# Altium PCB PCB1.PcbDoc (part 2 of 2)
Units mm, origin at the board's own origin, x right, y up, seen from the top; angles counter-clockwise.
Board outline 100 x 91 mm, 2 copper layers (Top Layer, Bottom Layer); 156 components, 114 nets, 531 pads, 381 vias.
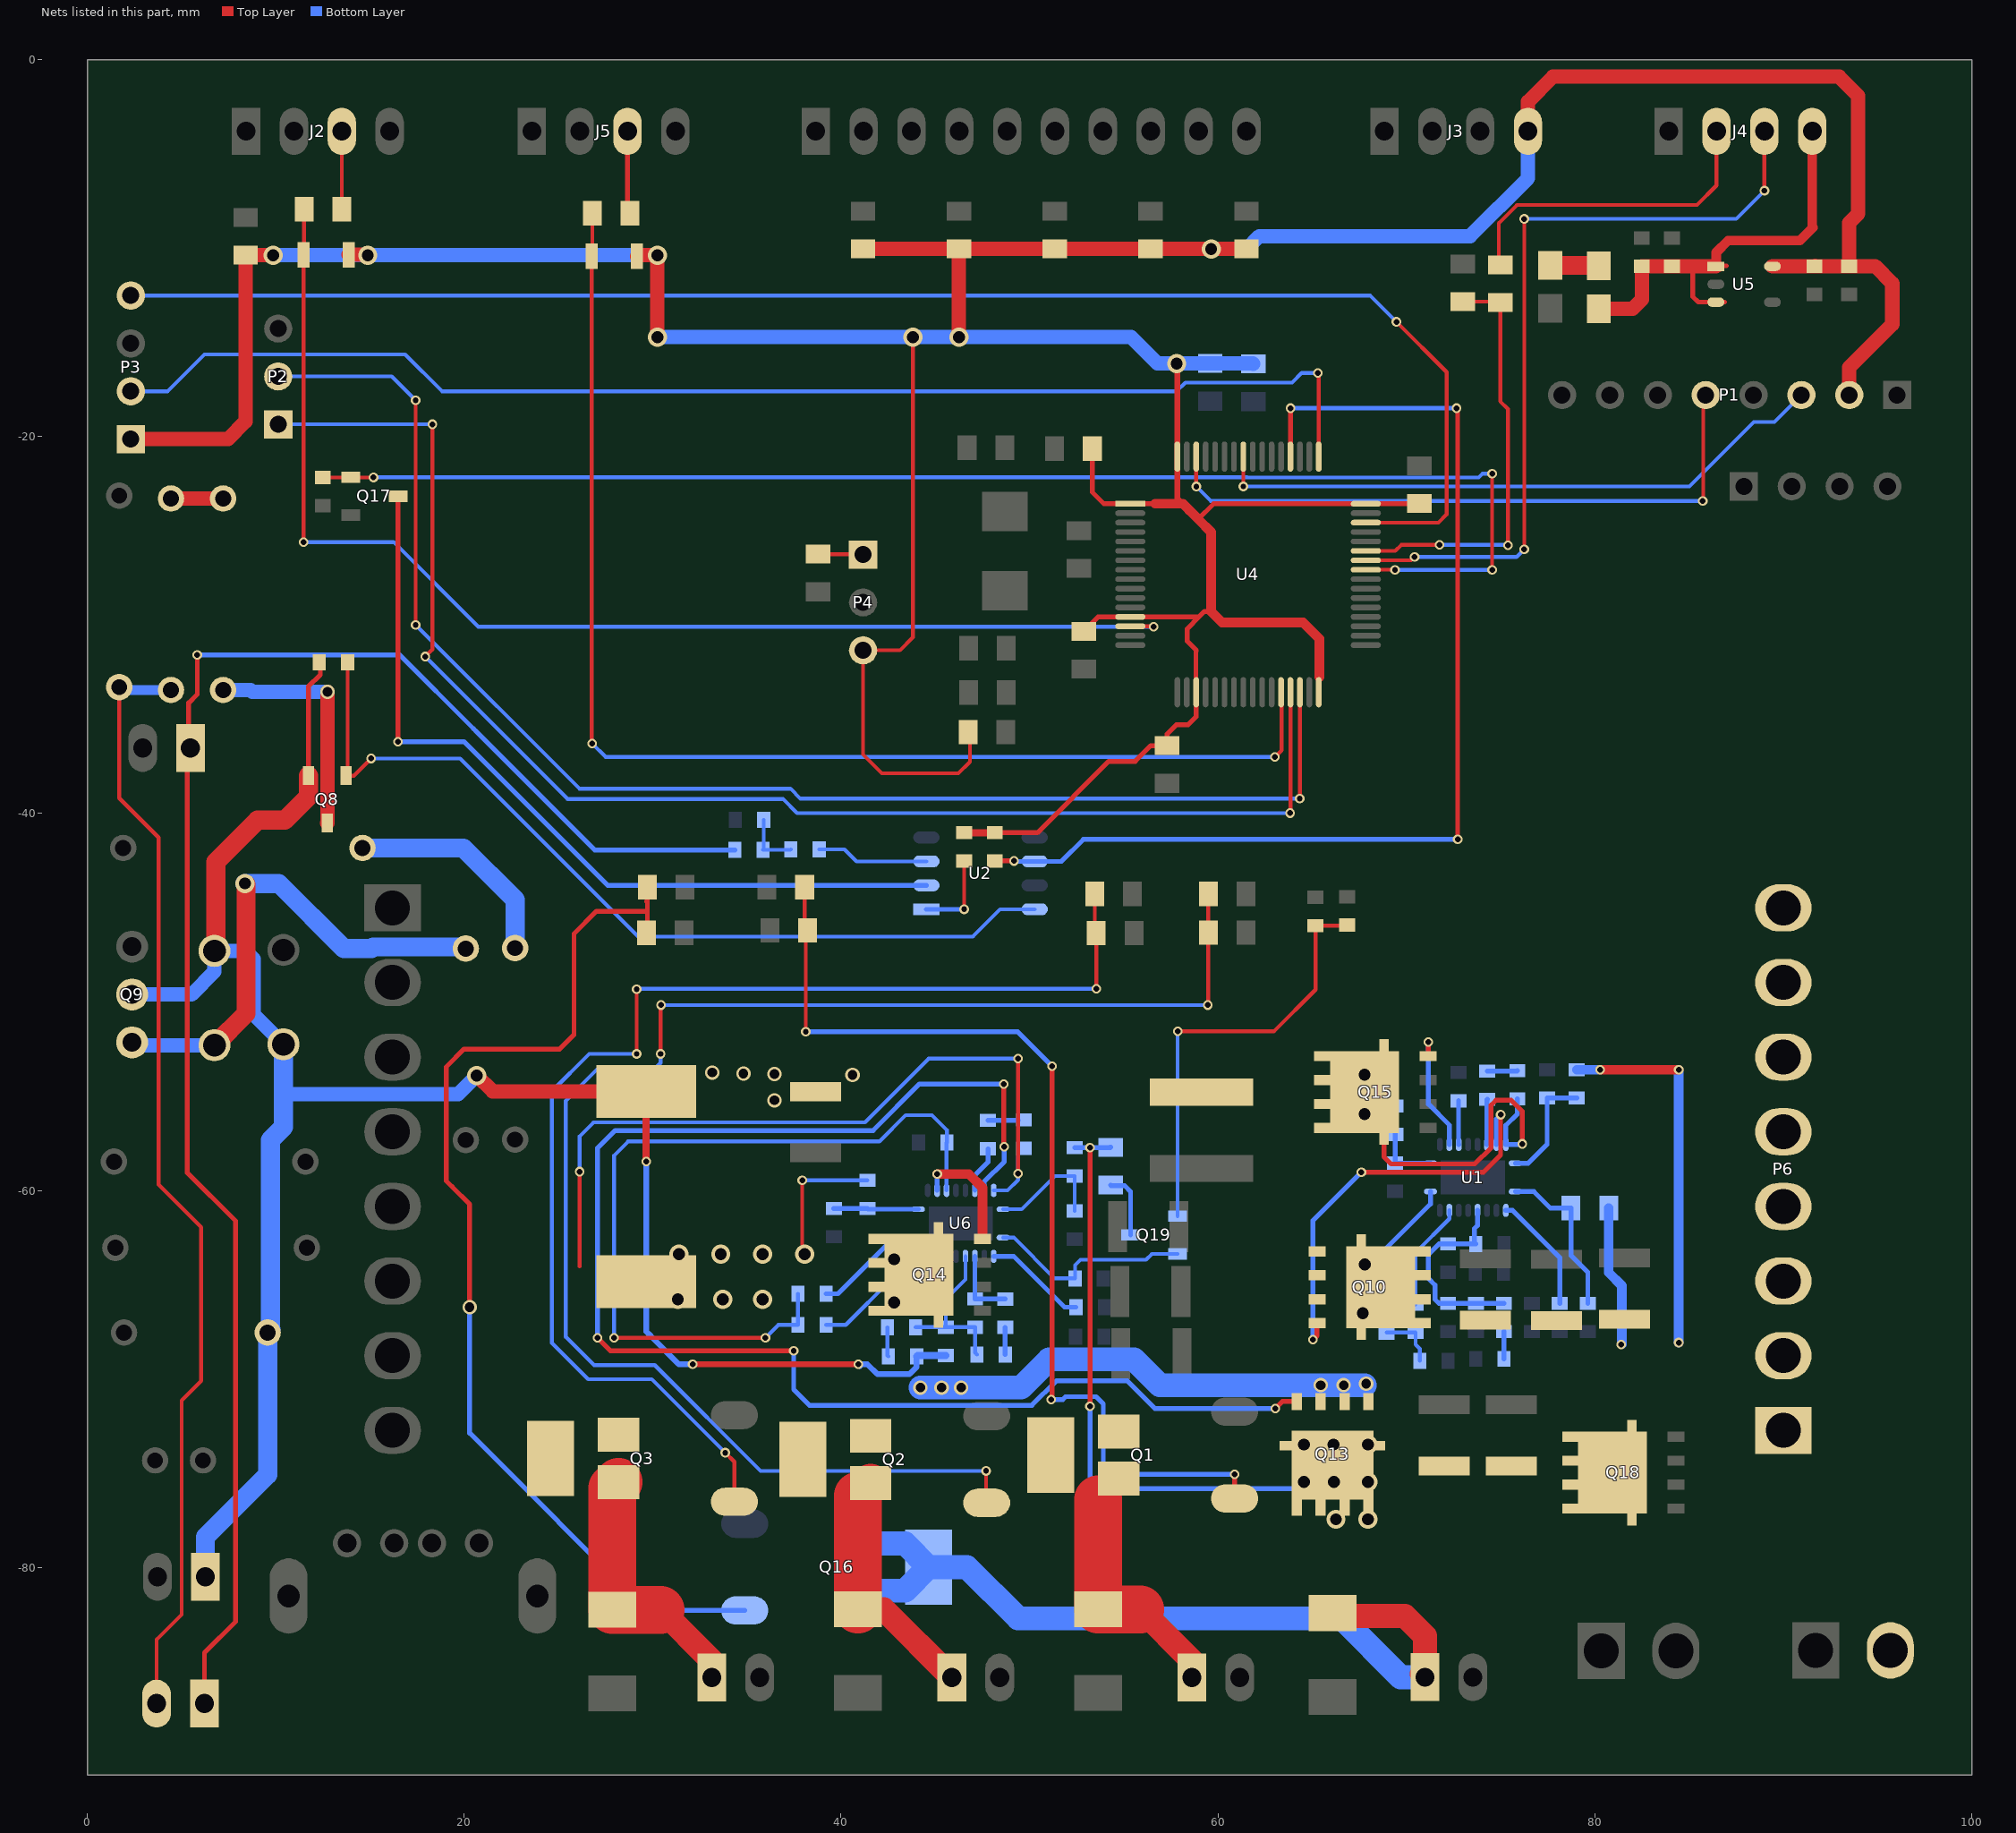
[diagram p2: the nets of this part, all layers, seen from the top]

## Via types
v1: diameter 0.762, hole 0.508, Top Layer to Bottom Layer, tented both sides, 182 vias
v2: diameter 0.508, hole 0.305, Top Layer to Bottom Layer, tented both sides, 142 vias
v3: diameter 1.016, hole 0.635, Top Layer to Bottom Layer, tented both sides, 57 vias

## Nets (pads, with @x,y where several pads share a name; then routed paths per layer and width w, separated by ;. In a path a pad name is that pad's centre, name@x,y a point inside that pad or via, vN(x,y) a via of type N, cw(c..) or ccw(c..) an arc to the next point about the centre after c; other vN are vias at no path point) (continued)
NetC24_2: C24.2 Q9.1 R61.2 | length 26.9
  Top Layer w1.016: C24.2@6.751,-52.295 8.427,-50.618 v3@8.427,-43.764
  Bottom Layer w0.762: Q9.1@2.382,-52.146 2.53,-52.295 C24.2@6.751,-52.295
  Bottom Layer w1.016: v3(8.376,-43.713) 8.966,-43.713 9.621,-43.713 10.16,-43.713 13.614,-47.168 15.085,-47.168 15.169,-47.083 20.001,-47.083 R61.2@20.086,-47.168
NetC32_2: C32.2 C54.1 R29.1 R45.1 R65.2 U1.5 | length 10.9
  Bottom Layer w0.254: U1.5@73.777,-61.059 73.777,-61.853 73.603,-62.027 73.603,-62.765 C32.2@73.678,-62.84 R29.1@72.206,-62.84 71.724,-62.84 71.165,-63.398 71.165,-64.668 71.521,-65.024 71.521,-65.786 71.724,-65.989 72.208,-65.989 R45.1@72.21,-65.988 R65.2@73.692,-65.988 C54.1@75.175,-65.988
NetC38_1: C38.1 R35.1 | length 1.6
  Bottom Layer w0.254: R35.1@47.797,-56.286 C38.1@49.397,-56.286
NetC38_2: C38.2 L5.1 Q13.1 Q13.2 Q13.3 Q14.5 Q14.6 Q14.7 Q14.8 R38.1 U6.19 | length 72.8
  Top Layer w0.203: 26.131,-64.033 v2(26.131,-59.004) ; 37.942,-62.865 v2(37.942,-59.461) ; v2(49.397,-59.106) v2(49.397,-53.01)
  Bottom Layer w0.203: v2(26.131,-59.004) 26.131,-57.125 26.867,-56.388 41.269,-56.388 44.647,-53.01 v2(49.397,-53.01) ; v2(37.942,-59.461) R38.1@41.396,-59.461 ; U6.19@48.099,-59.997 48.836,-59.997 49.397,-59.436 v2(49.397,-59.106) C38.2@49.397,-57.786
  Bottom Layer w1.27: v1(44.216,-70.46) v1(45.333,-70.46) v1(46.375,-70.46) 49.55,-70.46 51.048,-68.961 55.544,-68.961 56.916,-70.333 v1(65.45,-70.333) v1(66.669,-70.333) v1@67.787,-70.333
  other v1: 67.863,-70.256
  other v3: 42.819,-65.938 31.338,-65.786 33.725,-65.786 35.834,-65.786 42.819,-63.652 31.389,-63.373 33.615,-63.373 35.842,-63.373 38.069,-63.373
NetC39_2: C39.2 R37.2 U6.20 | length 6.4
  Bottom Layer w0.203: U6.20@48.599,-60.997 49.588,-60.997 51.352,-59.234 R37.2@52.394,-59.234 C39.2@52.394,-61.086
NetC40_2: C40.2 R38.2 U6.11 | length 4.5
  Bottom Layer w0.254: C40.2@39.618,-60.959 39.621,-60.961 R38.2@41.396,-60.961 41.432,-60.997 U6.11@44.099,-60.997
NetC43_1: C43.1 R31.1 | length 1.6
  Bottom Layer w0.254: R31.1@74.289,-53.67 75.864,-53.67 C43.1@75.889,-53.645
NetC43_2: C43.2 L1.1 Q10.1 Q10.2 Q10.3 Q15.5 Q15.6 Q15.7 Q15.8 R27.1 U1.19 | length 19
  Top Layer w0.254: Q15.8@68.805,-56.778 68.805,-58.219 69.184,-58.598 73.629,-58.598 74.492,-57.734 74.492,-55.474 74.746,-55.22 75.559,-55.22 76.143,-55.804 v2(76.143,-57.531)
  Bottom Layer w0.254: v3(67.78,-55.952) 68.207,-55.524 R27.1@69.412,-55.524 ; C43.2@75.889,-55.145 75.889,-55.931 75.277,-56.543 U1.19@75.277,-57.559 76.115,-57.559 v2(76.143,-57.531)
  other v3: 67.78,-53.858
NetC47_2: C47.2 R33.2 U1.20 | length 6.1
  Bottom Layer w0.254: U1.20@75.777,-58.559 76.462,-58.559 77.464,-57.556 C47.2@77.464,-55.094 R33.2@79.039,-55.094
NetC49_2: C49.2 R27.2 U1.11 | length 3.4
  Bottom Layer w0.254: R27.2@69.412,-57.024 69.412,-58.52 C49.2@69.387,-58.546 69.4,-58.559 U1.11@71.277,-58.559
NetC51_1: C51.1 C52.1 U6.4 | length 3.9
  Bottom Layer w0.254: U6.4@47.099,-63.497 47.099,-65.747 C52.1@47.111,-65.759 48.71,-65.759 C51.1@48.711,-65.761
NetC51_2: C51.2 R41.2 | length 1.4
  Bottom Layer w0.254: C51.2@48.711,-67.261 48.711,-68.704 R41.2@48.713,-68.706
NetC52_2: C52.2 C53.1 R41.1 R43.1 R44.2 U6.5 | length 8.8
  Bottom Layer w0.203: C53.1@43.962,-67.258 43.963,-67.256 R44.2@45.562,-67.256 ; U6.5@46.599,-63.497 46.599,-64.722 R43.1@45.562,-65.759 R44.2@45.562,-67.256 ; R41.1@47.213,-68.706 47.111,-68.604 C52.2@47.111,-67.259 47.108,-67.256 R44.2@45.562,-67.256
NetC53_2: C53.2 R46.2 | length 1.6
  Bottom Layer w0.203: C53.2@42.462,-67.258 42.462,-68.756 R46.2@42.512,-68.807
NetC54_2: C54.2 R66.2 | length 1.4
  Bottom Layer w0.254: C54.2@75.175,-67.488 75.18,-67.492 R66.2@75.18,-68.936
NetC55_1: C55.1 R64.2 R73.2 | length 3.1
  Bottom Layer w0.203: R64.2@68.955,-67.54 R73.2@70.485,-67.54 70.485,-68.174 70.714,-68.402 C55.1@70.714,-69.037
NetFB1_2: FB1.2 FU2.1 | length 2.6
  Top Layer w1.016: FB1.2@77.638,-10.922 80.178,-10.922 FU2.1@80.203,-10.947
NetHUMID1_1: HUMID1.1 HUMID3.1 R57.2 | length 90.5
  Top Layer w0.254: v2(5.836,-31.598) 5.836,-33.68 5.379,-34.138 5.379,-36.424 HUMID3.1@5.481,-36.525 5.303,-36.703 5.303,-59.055 7.868,-61.62 7.868,-82.88 6.217,-84.531 HUMID1.1@6.217,-87.224
  Bottom Layer w0.254: v2(5.836,-31.598) 15.189,-31.598 16.586,-31.598 20.498,-35.509 20.625,-35.636 26.924,-41.935 R57.2@34.365,-41.935
NetHUMID1_2: HUMID1.2 R25.2 R26.2 | length 59.5
  Top Layer w0.203: R26.2@1.696,-33.299 1.696,-39.186 3.785,-41.275 3.785,-59.69 6.045,-61.951 6.045,-70.104 5.004,-71.145 5.004,-82.499 3.677,-83.826 HUMID1.2@3.677,-87.224
  Bottom Layer w0.203: R26.2@1.696,-33.299 R26.2@1.848,-33.452
  Bottom Layer w0.508: R26.2@1.848,-33.452 R25.2@4.439,-33.452
NetJ2_3: J2.3 R2.1 | length 4.1
  Top Layer w0.203: R2.1@13.507,-7.95 J2.3@13.507,-3.81
NetJ5_3: J5.3 R4.1 | length 4.4
  Top Layer w0.254: J5.3@28.671,-3.81 28.671,-8.021 R4.1@28.804,-8.153
NetL2_1: L2.1 R60.2 | length 11.8
  Bottom Layer w1.016: L2.1@14.605,-41.834 19.959,-41.834 22.702,-44.577 R60.2@22.702,-47.142
NetP4_1: P4.1 R17.2 | length 2.4
  Top Layer w0.203: R17.2@38.78,-26.245 41.149,-26.245 P4.1@41.168,-26.264
NetQ1_1: Q1.1 R1.2 R3.2 | length 54.9
  Top Layer w0.203: v2@38.037,-51.499 v2(38.125,-51.587) 38.125,-49.911 ; R3.2@38.068,-46.602 R3.2@38.075,-46.609 ; R1.2@38.068,-43.917 38.068,-46.101 38.125,-46.158 38.125,-49.911 ; 38.125,-48.92 38.125,-49.911
  Top Layer w0.254: v2@51.201,-71.044 v2(51.201,-53.416) ; Q1.1@60.88,-76.341 v2@60.88,-75.059
  Bottom Layer w0.254: v2(38.125,-51.587) 49.372,-51.587 v2(51.201,-53.416) ; v2(51.15,-71.095) 51.759,-71.095 51.912,-70.942 53.537,-70.942 53.918,-71.323 53.918,-74.473 54.503,-75.057 v2(60.878,-75.057)
NetQ2_1: Q2.1 R5.2 R6.2 | length 83.4
  Top Layer w0.203: v2(30.423,-52.756) 30.423,-50.19 v2(30.449,-50.165) ; v2(47.695,-74.879) 47.695,-76.543 Q2.1@47.722,-76.57 ; v2@59.488,-50.139 R6.2@59.488,-46.323 ; R6.2@59.488,-46.304 R6.2@59.488,-46.323 ; R5.2@59.488,-44.272 59.488,-46.285 59.469,-46.304 R6.2@59.488,-46.323
  Bottom Layer w0.203: v2(30.423,-52.756) 30.423,-53.238 30.068,-53.594 27.045,-53.594 25.394,-55.245 25.394,-67.767 26.893,-69.266 30.119,-69.266 35.732,-74.879 v2(47.695,-74.879) ; v2(30.449,-50.165) v2(59.461,-50.165) v2@59.487,-50.14
NetQ3_1: Q3.1 R10.2 R11.2 | length 66
  Top Layer w0.203: v2(29.153,-52.756) v2(29.153,-49.327) ; v2(33.852,-73.914) 34.337,-74.398 Q3.1@34.337,-76.519 ; R10.2@53.468,-44.272 53.468,-46.272 R11.2@53.544,-46.348 v2(53.544,-49.301)
  Bottom Layer w0.203: v2(29.153,-52.756) 26.639,-52.756 24.658,-54.737 24.658,-68.097 26.575,-70.015 29.953,-70.015 v2(33.852,-73.914) ; v2(29.153,-49.327) 29.179,-49.301 v2@53.543,-49.301
NetQ8_1: Q8.1 R63.1 U2.8 | length 47.6
  Top Layer w0.203: 13.812,-32.969 13.812,-33.096 ; R63.1@13.812,-31.979 13.812,-33.096 ; v2(15.062,-37.084) 14.148,-37.998 Q8.1@13.736,-37.998 13.812,-37.922 13.812,-33.096
  Bottom Layer w0.203: v2(15.062,-37.084) 19.787,-37.084 29.235,-46.533 34.544,-46.533 46.99,-46.533 48.438,-45.085 U2.8@50.276,-45.085
NetQ8_3: Q8.3 R24.2 | length 12.7
  Top Layer w0.762: Q8.3@12.736,-40.498 12.752,-40.482 12.752,-37.141 v1(12.752,-33.554)
  Bottom Layer w0.762: R24.2@7.309,-33.553 R24.2@7.208,-33.452 8.661,-33.452 8.764,-33.554 v1(12.752,-33.554)
NetQ10_4: Q10.4 U1.18 | length 22.2
  Top Layer w0.254: v2(65.044,-67.92) 65.257,-67.706 Q10.4@65.257,-67.04 ; v2(67.609,-59.03) 74.086,-59.03 75,-58.115 v2(75,-55.982)
  Bottom Layer w0.254: v2(65.044,-67.92) 65.044,-61.595 v2(67.609,-59.03) ; U1.18@74.777,-57.559 74.777,-56.205
NetQ13_4: Q13.4 U6.18 | length 80.2
  Top Layer w0.254: v2(27.071,-67.818) 27.756,-68.504 v2(37.485,-68.504) ; v2@48.635,-57.683 v2(48.635,-54.356) ; v2(63.037,-71.577) 63.415,-71.199 Q13.4@64.175,-71.199
  Bottom Layer w0.254: v2(27.071,-67.818) 27.071,-57.76 28.01,-56.82 41.701,-56.82 44.165,-54.356 v2(48.635,-54.356) ; v2(37.485,-68.504) 37.485,-70.561 38.323,-71.399 50.127,-71.399 51.422,-70.104 55.188,-70.104 56.662,-71.577 v2(63.037,-71.577) ; U6.18@47.599,-59.997 47.599,-59.532 48.661,-58.471 v2(48.661,-57.683)
NetQ14_4: Q14.4 U6.13 | length 6.3
  Top Layer w0.508: v2(45.105,-59.131) 46.781,-59.131 47.507,-59.858 Q14.4@47.507,-62.576
  Bottom Layer w0.254: U6.13@45.099,-59.997 45.099,-59.137 v2(45.105,-59.131)
NetQ15_4: Q15.4 U1.13 | length 6.7
  Top Layer w0.254: Q15.4@71.155,-52.873 71.165,-52.863 v2(71.165,-52.121)
  Bottom Layer w0.254: v2(71.165,-52.121) 71.165,-55.423 72.277,-56.535 U1.13@72.277,-57.559
NetQ16_1: Q16.1 R52.2 R53.2 | length 58.9
  Top Layer w0.254: v1(20.289,-66.192) 20.289,-60.731 19.352,-59.794 19.05,-59.493 19.05,-53.442 19.99,-52.502 25.07,-52.502 25.832,-51.74 25.832,-46.38 27.026,-45.187 29.693,-45.187 ; R53.2@29.674,-46.33 29.725,-46.279 R52.2@29.725,-43.917 29.719,-43.917 29.719,-44.653 29.693,-44.679
  Bottom Layer w0.254: v1(20.289,-66.192) 20.289,-72.873 29.701,-82.285 Q16.1@34.892,-82.285
NetQ17_3: Q17.3 U2.2 | length 44.2
  Top Layer w0.254: Q17.3@16.479,-23.163 Q17.3@16.49,-23.174 v2(16.49,-36.19) v2@16.485,-36.195
  Bottom Layer w0.254: v2(16.49,-36.19) 19.985,-36.19 27.61,-43.815 U2.2@44.526,-43.815
NetQ19_1: Q19.1 R71.2 R72.1 | length 23.1
  Top Layer w0.203: v2(57.861,-51.562) 62.967,-51.562 65.176,-49.352 R71.2@65.176,-45.95 65.202,-45.95 66.826,-45.95 R72.1@66.853,-45.923
  Bottom Layer w0.203: Q19.1@57.861,-61.366 v2(57.861,-51.562)
NetQ19_2: Q19.2 R34.2 U6.1 | length 11.1
  Bottom Layer w0.203: U6.1@48.599,-62.497 49.162,-62.497 51.333,-64.668 R34.2@52.418,-64.668 52.418,-63.964 52.705,-63.678 56.185,-63.678 56.496,-63.366 Q19.2@57.861,-63.366
NetQ19_3: Q19.3 R36.1 | length 3.5
  Bottom Layer w0.254: R36.1@54.299,-59.715 54.325,-59.741 55.042,-59.741 55.361,-60.06 Q19.3@55.361,-62.366
NetR23_1: R23.1 U2.1 | length 4.6
  Top Layer w0.203: v2(46.533,-45.085) R23.1@46.533,-42.519
  Bottom Layer w0.203: v2@46.507,-45.059 v2(46.533,-45.085)
  Bottom Layer w0.254: U2.1@44.526,-45.085 v2(46.533,-45.085)
NetR24_1: R24.1 R25.1 | length 2.8
  Top Layer w0.762: R25.1@4.439,-23.292 R24.1@7.208,-23.292
NetR31_2: R31.2 U1.17 | length 2.4
  Bottom Layer w0.254: U1.17@74.277,-57.559 74.277,-55.182 R31.2@74.289,-55.17
NetR32_1: R32.1 R68.2 U1.1 | length 8.7
  Bottom Layer w0.254: U1.1@75.777,-60.059 76.766,-60.059 77.642,-60.935 R32.1@78.734,-60.935 78.734,-63.449 79.623,-64.338 R68.2@79.623,-65.988
NetR35_2: R35.2 U6.17 | length 2.5
  Bottom Layer w0.254: U6.17@47.099,-59.997 47.099,-59.194 47.797,-58.496 R35.2@47.797,-57.786
NetR39_1: R39.1 U6.10 | length 6.1
  Bottom Layer w0.254: R39.1@39.237,-65.481 R39.1@39.212,-65.481 39.835,-65.481 42.819,-62.497 U6.10@44.099,-62.497
NetR40_1: R40.1 U6.8 | length 7.7
  Bottom Layer w0.203: R40.1@39.212,-67.132 40.253,-67.132 42.692,-64.694 44.495,-64.694 45.099,-64.09 U6.8@45.099,-63.497
NetR47_2: R47.2 U6.2 | length 5.5
  Bottom Layer w0.254: U6.2@48.099,-63.497 49.166,-63.497 51.861,-66.192 R47.2@52.469,-66.192
NetR55_2: R55.2 R56.2 U4.43 | length 22.8
  Top Layer w0.203: U4.43@67.847,-26.071 69.407,-26.071 69.723,-25.756 v2(71.755,-25.756) v2@71.78,-25.781 ; R55.2@73,-12.846 74.93,-12.846 R56.2@74.981,-12.897 74.981,-18.136 75.387,-18.542 v2(75.387,-25.781)
  Bottom Layer w0.203: v2(71.755,-25.756) 75.362,-25.756 v2(75.387,-25.781)
NetR57_1: R57.1 R62.2 R69.2 | length 3.1
  Bottom Layer w0.203: R62.2@35.892,-40.335 35.892,-41.909 R57.1@35.865,-41.935 37.311,-41.935 R69.2@37.337,-41.91
NetR64_1: R64.1 U1.10 | length 6.9
  Bottom Layer w0.254: R64.1@68.955,-66.04 68.955,-63.043 71.277,-60.721 U1.10@71.277,-60.059
NetR67_2: R67.2 U1.2 | length 6.3
  Bottom Layer w0.254: U1.2@75.277,-61.059 75.633,-61.059 78.14,-63.567 R67.2@78.14,-65.988
NetR69_1: R69.1 U2.3 | length 6
  Bottom Layer w0.203: R69.1@38.837,-41.91 40.183,-41.91 40.818,-42.545 U2.3@44.526,-42.545
NetR73_1: R73.1 U1.8 | length 5.7
  Bottom Layer w0.203: R73.1@70.485,-66.04 70.485,-63.297 72.277,-61.505 U1.8@72.277,-61.059
OUT1: D1.A J1.1 Q1.2 | length 12.8
  Top Layer w1.27: 55.877,-82.22 58.617,-84.961 J1.1@58.617,-85.839
  Top Layer w2.54: 53.638,-76.382 D1.A@53.638,-82.22 55.877,-82.22
OUT2: D4.A J6.1 Q2.2 | length 13.5
  Top Layer w1.27: D4.A@40.901,-82.22 42.26,-82.22 J6.1@45.879,-85.839
  Top Layer w2.032: Q2.2@40.901,-76.191 Q2.2@41.572,-75.52
  Top Layer w2.54: D4.A@40.901,-82.22 Q2.2@40.901,-76.191
OUT3: D5.A J7.1 Q3.2 | length 14.2
  Top Layer w1.27: 30.426,-82.245 33.141,-84.961 J7.1@33.141,-85.839
  Top Layer w2.54: Q3.2@28.187,-75.469 27.858,-75.797 D5.A@27.858,-82.245 30.426,-82.245
OUT4: D6.A J9.1 Q16.2 | length 45
  Top Layer w1.27: D6.A@66.085,-82.423 66.237,-82.575 69.92,-82.575 70.987,-83.642 J9.1@70.987,-85.827 J9.1@70.809,-85.649
  Bottom Layer w1.27: Q16.2@41.042,-81.235 43.392,-81.235 Q16.2@44.642,-79.985 ; Q16.2@41.042,-78.735 43.392,-78.735 Q16.2@44.642,-79.985 ; J9.1@71.063,-85.75 J9.1@70.987,-85.827 69.692,-85.827 66.568,-82.702 49.397,-82.702 46.679,-79.985 Q16.2@44.642,-79.985
PWM: Q17.1 R54.2 U4.41 | length 74
  Top Layer w0.203: R54.2@12.497,-22.173 13.988,-22.173 Q17.1@13.99,-22.174 v2(15.189,-22.174) ; U4.41@67.847,-27.071 69.388,-27.071 v2(69.393,-27.076) ; v2(74.549,-27.076) v2(74.549,-21.971)
  Bottom Layer w0.203: v2(15.189,-22.174) 15.195,-22.168 61.547,-22.168 61.553,-22.174 73.838,-22.174 74.041,-21.971 v2(74.549,-21.971) ; v2(69.393,-27.076) v2(74.549,-27.076)
RES: P1.5 U4.62 | length 34.7
  Top Layer w0.203: U4.62@58.847,-21.071 58.847,-22.651 v2(58.852,-22.656) ; v2@85.75,-23.419 85.75,-21.565 ; 85.75,-21.361 85.75,-21.565 ; P1.5@85.877,-17.805 85.75,-17.932 85.75,-21.565
  Bottom Layer w0.203: v2(58.852,-22.656) 59.614,-23.419 83.058,-23.419 v2(85.725,-23.419) v2@85.75,-23.419
RX: J4.2 R56.1 | length 17.5
  Top Layer w0.203: R56.1@74.981,-10.897 74.905,-10.82 74.905,-8.687 75.87,-7.722 85.42,-7.722 86.456,-6.686 J4.2@86.456,-3.81
RX3: P2.2 U4.30 | length 76.1
  Top Layer w0.203: v2(17.424,-29.997) v2(17.424,-18.085) ; v2(64.338,-39.218) 64.347,-39.209 U4.30@64.347,-33.571
  Bottom Layer w0.203: P2.2@10.135,-16.815 16.154,-16.815 v2(17.424,-18.085) ; v2(17.424,-29.997) 26.111,-38.684 37.313,-38.684 37.846,-39.218 v2(64.338,-39.218)
SCK: P1.3 U4.57 | length 33.2
  Top Layer w0.203: v2@61.341,-22.656 v2(61.347,-22.651) U4.57@61.347,-21.071
  Bottom Layer w0.203: v2(61.347,-22.651) 85.02,-22.651 88.439,-19.232 89.531,-19.232 P1.3@90.957,-17.805
SW1: D2.A R2.2 U4.14 | length 65.9
  Top Layer w0.203: v2(11.481,-25.603) 11.475,-25.597 D2.A@11.475,-10.363 11.507,-10.331 R2.2@11.507,-7.95 ; U4.14@55.347,-30.071 56.563,-30.071 v2(56.591,-30.099)
  Bottom Layer w0.203: v2(11.481,-25.603) 13.31,-25.603 16.256,-25.603 20.752,-30.099 v2(56.591,-30.099)
SW2: D3.A R4.2 U4.28 | length 69
  Top Layer w0.203: v2@26.772,-36.271 D3.A@26.772,-10.439 ; 26.772,-11.176 D3.A@26.772,-10.439 ; R4.2@26.804,-8.153 26.804,-10.407 D3.A@26.772,-10.439 ; v2(63.017,-37.008) 63.373,-36.652 63.373,-33.598 U4.28@63.347,-33.571
  Bottom Layer w0.203: v2(26.797,-36.297) 27.508,-37.008 v2(63.017,-37.008)
SWCLK: P3.2 U4.49 | length 69.5
  Top Layer w0.203: v2(65.303,-16.637) 65.347,-16.68 U4.49@65.347,-21.071
  Bottom Layer w0.203: P3.2@2.311,-17.602 4.267,-17.602 6.223,-15.646 13.386,-15.646 16.866,-15.646 18.821,-17.602 18.847,-17.602 57.81,-17.602 58.268,-17.145 63.932,-17.145 64.44,-16.637 v2(65.303,-16.637)
SWD: P3.4 U4.46 | length 83.5
  Top Layer w0.203: U4.46@67.847,-24.571 71.695,-24.571 72.136,-24.13 72.136,-16.586 v2(69.469,-13.919)
  Bottom Layer w0.203: P3.4@2.311,-12.522 68.072,-12.522 v2(69.469,-13.919)
TX: J4.3 U4.42 | length 42.7
  Top Layer w0.203: U4.42@67.847,-26.571 70.254,-26.571 v2(70.434,-26.391) ; v2(76.251,-25.984) v2(76.251,-8.458) ; J4.3@88.996,-3.81 88.996,-6.954 v2(89.002,-6.96)
  Bottom Layer w0.203: v2(70.434,-26.391) 73.508,-26.391 75.844,-26.391 v2(76.251,-25.984) ; v2(76.251,-8.458) 87.503,-8.458 v2(89.002,-6.96)
TX3: P2.1 U4.29 | length 76.4
  Top Layer w0.203: v2(17.937,-31.678) 18.313,-31.301 v2(18.313,-19.355) ; U4.29@63.847,-33.571 63.856,-33.58 v2@63.856,-39.954
  Bottom Layer w0.203: P2.1@10.135,-19.355 v2(18.313,-19.355) ; v2(17.937,-31.678) 25.489,-39.23 36.919,-39.23 37.668,-39.98 v2(63.83,-39.98) v2@63.856,-39.954
VCC: C27.2 C28.1 FU2.2 J4.4 U5.1 U5.3 | length 23.4
  Top Layer w0.254: 85.268,-10.974 85.192,-11.05 85.192,-12.573 85.491,-12.873 U5.3@86.42,-12.873 86.878,-12.873 ; U5.1@86.736,-10.947 86.979,-10.947
  Top Layer w0.508: U5.1@86.42,-10.973 86.436,-10.957 86.436,-10.236 87.071,-9.601 90.881,-9.601 91.567,-8.915 91.536,-8.884 J4.4@91.536,-3.81
  Top Layer w0.762: FU2.2@80.203,-13.233 81.991,-13.233 82.489,-12.735 C28.1@82.489,-10.973 82.491,-10.974 C27.2@84.089,-10.974 85.268,-10.974 86.419,-10.974 U5.1@86.42,-10.973
VCC_3.3V: C4.2 C5.2 C6.2 C7.2 C26.2 C56.1 D2.K D3.K J3.4 P1.2 P3.1 P4.3 R7.2 R8.2 R9.2 R12.1 R13.1 R15.1 R22.2 R23.2 R58.2 R59.1 R70.2 U4.1 U4.13 U4.19 U4.32 U4.48 U4.64 U5.5 | length 267.4
  Top Layer w0.203: v3(43.815,-14.732) 43.815,-30.658 43.129,-31.344 P4.3@41.168,-31.344 41.168,-36.875 42.164,-37.871 46.228,-37.871 46.838,-37.262 46.838,-35.789 R15.1@46.736,-35.687
  Top Layer w0.254: R23.2@46.433,-40.919 R23.2@46.533,-41.019 ; R70.2@48.158,-41.019 50.421,-41.019 54.204,-37.236 55.608,-37.236 56.439,-36.405 C6.2@57.302,-36.405 57.302,-35.789 57.791,-35.3 58.408,-35.3 58.847,-34.861 U4.19@58.847,-33.571 ; C4.2@52.883,-30.334 53.646,-29.571 U4.13@55.347,-29.571 ; C5.2@53.333,-20.65 53.333,-22.955 53.95,-23.571 U4.1@55.347,-23.571 56.667,-23.571 ; U4.13@55.355,-29.563 U4.13@55.347,-29.571 ; U4.19@58.839,-33.563 U4.19@58.847,-33.571 ; 58.966,-24.397 58.953,-24.384 59.766,-23.571 U4.48@67.847,-23.571 70.682,-23.571 C7.2@70.688,-23.565 ; 59.639,-29.286 59.284,-29.286 58.999,-29.571 ; U4.13@55.347,-29.571 58.999,-29.571 ; U4.19@58.847,-33.571 58.826,-33.551 58.826,-31.392 58.847,-31.372 58.847,-31.338 58.369,-30.861 58.369,-30.201 58.999,-29.571
  Top Layer w0.305: v3@57.861,-16.129 57.847,-16.144 U4.64@57.847,-21.071 57.847,-23.277 58.141,-23.571
  Top Layer w0.381: R23.2@46.533,-41.019 R70.2@48.158,-41.019
  Top Layer w0.508: 56.667,-23.571 58.141,-23.571 58.636,-24.066 ; 58.453,-23.883 58.636,-24.066 ; 58.953,-24.384 58.636,-24.066 ; 58.966,-24.397 59.639,-25.07 59.639,-29.286 60.223,-29.87 64.516,-29.87 65.378,-30.732 65.378,-32.766
  Top Layer w0.762: P3.1@2.311,-20.142 7.468,-20.142 8.402,-19.208 R22.2@8.402,-10.382 9.849,-10.382 v3(9.855,-10.389) ; D2.K@13.875,-10.363 14.707,-10.363 v3@14.732,-10.389 ; D3.K@29.172,-10.439 29.222,-10.389 v3(30.251,-10.389) v3(30.251,-14.732) ; R9.2@41.168,-10.052 R8.2@46.254,-10.052 ; v3(46.254,-14.731) R8.2@46.254,-10.052 ; R58.2@61.513,-10.052 R59.1@56.427,-10.052 R7.2@51.34,-10.052 R8.2@46.254,-10.052 ; J3.4@76.448,-3.81 76.448,-2.241 77.775,-0.914 92.96,-0.914 93.976,-1.93 93.976,-8.183 93.497,-8.661 93.497,-10.961 C56.1@93.487,-10.971 ; U5.5@89.42,-10.973 91.651,-10.973 C26.2@91.678,-10.946 ; C26.2@91.653,-10.971 C56.1@93.487,-10.971 ; P1.2@93.497,-17.805 93.497,-16.332 95.783,-14.046 95.783,-11.886 94.869,-10.971 C56.1@93.487,-10.971
  Bottom Layer w0.305: P4.3@41.041,-31.217 P4.3@41.168,-31.344
  Bottom Layer w0.762: v3(9.855,-10.389) v3(14.884,-10.389) v3(30.251,-10.389) ; v3(30.251,-14.732) 55.397,-14.732 56.794,-16.129 v3(57.81,-16.129) R13.1@59.588,-16.129 61.849,-16.129 R12.1@61.874,-16.154 ; v3(59.639,-10.052) 61.513,-10.052 62.192,-9.373 73.381,-9.373 76.448,-6.305 J3.4@76.448,-3.81
VCC_12_24: J12.2 P6.5 P6.6 P6.7 P6.8
VCC_24V: C16.2 C17.2 C24.1 C41.1 HUMID2.1 L5.2 Q8.2 Q9.2 R44.1 R46.1 R63.2 | length 113.4
  Top Layer w0.254: Q8.2@11.736,-37.998 11.736,-33.273 12.37,-32.639 12.37,-32.037 R63.2@12.312,-31.979
  Top Layer w0.305: v2(32.125,-69.215) v2(40.914,-69.215)
  Top Layer w0.381: v2(29.661,-58.471) L5.2@29.661,-54.746
  Top Layer w0.762: v3(20.67,-53.907) 21.51,-54.746 L5.2@29.661,-54.746
  Top Layer w1.016: C24.1@6.751,-47.295 6.827,-47.219 6.827,-44.094 ; 6.827,-43.434 6.827,-44.094 ; Q8.2@11.736,-37.998 11.736,-39.1 10.475,-40.361 9.037,-40.361 6.827,-42.57 6.827,-44.094
  Bottom Layer w0.305: v2(29.661,-58.471) 29.661,-67.488 29.839,-67.666 29.992,-67.818 31.389,-69.215 v2(32.125,-69.215) ; v2@41.015,-69.317 v2(40.914,-69.215) 41.396,-69.215 41.93,-69.748 43.631,-69.748 44.012,-69.367 R46.1@44.012,-68.807
  Bottom Layer w0.381: R46.1@44.012,-68.807 44.063,-68.756 R44.1@45.562,-68.756
  Bottom Layer w0.762: Q9.2@2.382,-49.606 5.531,-49.606 6.751,-48.387 C24.1@6.751,-47.295 ; C24.1@6.598,-47.447 C24.1@6.751,-47.295 ; 10.408,-54.585 10.713,-54.889 19.687,-54.889 v3(20.67,-53.907) ; C16.2@10.408,-52.244 8.833,-50.669 8.833,-47.727 8.402,-47.295 C24.1@6.751,-47.295
  Bottom Layer w1.016: HUMID2.1@6.268,-80.493 6.268,-78.384 9.57,-75.082 C17.2@9.57,-67.539 C17.2@9.722,-67.386 ; C17.2@9.748,-67.361 C17.2@9.722,-67.386 ; C16.2@10.408,-52.244 10.408,-54.585 10.408,-56.642 9.722,-57.328 C17.2@9.722,-67.386
  other v1: 36.469,-55.22 40.609,-53.873 36.469,-53.823 34.818,-53.796 33.167,-53.746
VCC_L: C50.1 R39.2 R40.2 U6.14 | length 43.4
  Top Layer w0.203: v2(27.96,-67.818) v2(35.986,-67.818)
  Bottom Layer w0.203: v2(27.96,-67.818) 27.96,-58.141 28.696,-57.404 42.031,-57.404 43.428,-56.007 44.825,-56.007 45.613,-56.794 C50.1@45.613,-57.455 ; v2(35.986,-67.818) 36.672,-67.132 R40.2@37.712,-67.132 R39.2@37.712,-65.481 ; 45.581,-58.362 45.599,-58.344 ; U6.14@45.599,-59.997 45.599,-58.344 ; C50.1@45.599,-57.468 45.599,-58.344
VCC_L2: C13.1 U1.14 | length 2.3
  Bottom Layer w0.254: C13.1@72.765,-55.245 72.765,-57.547 U1.14@72.777,-57.559
VIN: C9.1 C10.1 C19.1 C20.1 C42.1 P6.1 P6.2 P6.3 P6.4 Q10.5 Q10.6 Q10.7 Q10.8 Q13.5 Q13.6 Q13.7 Q13.8 Q18.5 Q18.6 Q18.7 Q18.8 R32.2 R33.1 R36.2 R37.1 | length 58.6
  Top Layer w0.254: v2(53.207,-71.45) v2(53.207,-57.734)
  Top Layer w0.508: v2(80.284,-53.594) v2(84.449,-53.594)
  Bottom Layer w0.254: R37.1@52.394,-57.734 v2(53.207,-57.734) 54.281,-57.734 R36.2@54.299,-57.715 ; v2(53.207,-71.45) 53.207,-75.267 53.766,-75.826 64.198,-75.826 v3(64.561,-75.463) ; R36.2@54.281,-57.709 R36.2@54.299,-57.709
  Bottom Layer w0.508: R33.1@79.039,-53.594 v2(80.284,-53.594) ; R32.2@80.734,-60.935 80.734,-64.357 81.427,-65.049 v2@81.427,-68.148 ; v2(84.449,-68.072) v2(84.449,-53.594)
  other v2: 81.401,-68.174
  other v3: 66.263,-77.445 67.965,-77.445 66.161,-75.463 67.965,-75.463 64.561,-73.482 66.123,-73.482 67.965,-73.482 67.685,-66.523 67.787,-63.932
WATER_ADC: R70.1 U2.6 U4.52 | length 59.3
  Top Layer w0.254: R70.1@48.158,-42.519 v2(49.179,-42.519) ; U4.52@63.847,-21.071 v2(63.847,-18.5) ; v2(72.66,-18.5) 72.72,-18.56 v2(72.72,-41.377)
  Bottom Layer w0.254: v2(49.179,-42.519) 49.205,-42.545 U2.6@50.276,-42.545 51.689,-42.545 52.857,-41.377 v2(72.72,-41.377) ; v2(63.847,-18.5) v2(72.66,-18.5)
pads on no net: J5.1 U1.7 U4.10 U4.11 U4.25 U4.37 U4.38 U4.39 U4.40 U4.44 U4.45 U4.50 U4.51 U4.54 U6.7 USB1.2 USB1.3 USB1.6

## Polygon pours and split planes (outlines as drawn)
GND on Top Layer "Top Layer-No Net" (solid, remove dead copper, pour order 1001): -5.781,12.597 99.782,12.597 100.645,13.461 102.22,11.886 102.22,-89.993 101.89,-89.993 98.385,-93.498 97.673,-92.787 -4.028,-92.787 -4.028,-85.497 -7.178,-82.348 -3.165,-78.335 -3.165,13.639
+5V on Top Layer "Top Layer-No Net" (solid, remove dead copper, pour order 1000): 16.41,-42.872 27.581,-42.872 28.214,-42.872 28.541,-43.02 29.21,-43.321 29.21,-47.804 29.21,-50.216 28.395,-50.583 27.93,-50.793 22.112,-50.793 18.795,-50.793 18.446,-50.95 18.33,-51.003 18.33,-51.894 18.33,-77.457 18.737,-77.641 19.668,-77.641 20.25,-77.641 20.482,-77.745 20.89,-77.929 20.89,-78.584 20.89,-80.682 20.017,-81.075 19.901,-81.128 16.991,-81.128 15.188,-81.128 14.082,-80.629 9.195,-78.427 9.195,-43.872 9.195,-43.819 10.358,-43.295 11.296,-42.872 16.41,-42.872
GND on Bottom Layer "Top Layer-No Net" (solid, remove dead copper, pour order 1002): -5.369,9.649 100.193,9.649 101.057,10.513 102.631,8.938 102.631,-92.942 102.301,-92.942 98.796,-96.447 98.085,-95.736 -3.617,-95.736 -3.617,-88.446 -6.766,-85.296 -2.753,-81.283 -2.753,10.69

## Keep-outs
Keep-Out Layer:
  the board outline again, w0.254

## Other copper
Top Layer:
  rectangle net GND: 79.344,-88.113 81.198,-80.518
  rectangle net GND: 77.363,-84.963 82.163,-83.642
  rectangle net GND: 91.485,-87.097 92.501,-82.372
  rectangle net GND: 89.758,-85.09 92.349,-83.845
  rectangle net GND: 83.264,-73.406 86.405,-72.067
  rectangle net GND: 72.773,-64.694 84.017,-62.027
  rectangle net GND: 70.759,-57.785 72.638,-53.899
  rectangle net GND: 69.946,-72.814 77.152,-70.917
  rectangle net GND: 74.429,-72.282 77.152,-70.053
  rectangle net GND: 53.817,-71.468 56.001,-60.503
  rectangle net GND: 53.817,-61.468 55.442,-59.207
  rectangle net GND: 46.484,-67.158 49.245,-63.617
  rectangle net GND: 59.913,-74.435 62.598,-72.06
  rectangle net VCC_12_24: 93.415,-90.602 99.588,-50.825
  rectangle net VCC_12_24: 86.786,-58.318 99.537,-42.52
  rectangle net OUT2: 36.596,-76.403 42.717,-71.984
  rectangle net OUT3: 23.159,-76.224 29.668,-71.882
  rectangle net OUT1: 49.905,-76.251 55.9,-71.831
  pour cut-out: 11.932,-42.824 11.932,-50.597 9.062,-50.597 9.062,-42.824
  pour cut-out: 12.872,-61.396 13.177,-61.7 13.177,-63.783 12.593,-64.367 10.637,-64.367 10.307,-64.037 10.307,-61.396
  pour cut-out: 8.712,-66.319 10.439,-66.319 10.77,-66.65 10.77,-68.224 10.312,-68.682 8.712,-68.682 8.458,-68.428 8.458,-66.497 8.534,-66.497
  pour cut-out: 10.719,-57.252 12.446,-57.252 12.776,-57.582 12.776,-59.157 12.319,-59.614 10.719,-59.614 10.465,-59.36 10.465,-57.429 10.541,-57.429
  pour cut-out: 11.932,-50.597 11.932,-52.984 11.348,-53.569 9.062,-53.569 9.062,-50.597
  region net VCC_24V: 40.99,-53.289 41.168,-53.467 41.168,-55.118 40.558,-55.728 35.63,-55.728 34.868,-56.49 26.893,-56.49 26.486,-56.083 26.486,-53.492 26.69,-53.289
  region net NetC38_2: 64.917,-71.73 68.32,-71.73 68.447,-71.603 68.447,-69.901 68.371,-69.825 64.917,-69.825
  region net +12V: 61.919,-57.709 62.3,-58.09 62.3,-70.079 62.072,-70.307 58.541,-70.307 58.541,-78.486 63.85,-83.795 63.85,-85.903 63.316,-86.436 60.446,-86.436 59.989,-85.979 59.989,-82.906 56.611,-79.527 56.611,-60.122 55.925,-60.122 55.722,-59.919 55.722,-57.836 55.849,-57.709
  region net NetC43_2: 66.009,-66.294 66.237,-66.065 66.237,-58.217 66.542,-57.912 69.692,-57.912 69.971,-57.633 69.971,-51.867 69.641,-51.537 64.663,-51.537 63.926,-52.273 56.077,-52.273 55.595,-52.756 55.595,-55.448 55.95,-55.804 62.783,-55.804 62.783,-66.167 62.91,-66.294
  region net VIN: 82.773,-78.232 82.773,-71.882 83.001,-71.653 87.065,-71.653 87.243,-71.831 87.243,-74.701 87.548,-74.905 92.12,-74.905 92.12,-58.903 86.049,-58.903 85.643,-59.309 85.643,-64.694 85.16,-65.176 72.511,-65.176 72.283,-64.948 72.283,-62.357 71.851,-61.925 66.999,-61.925 66.72,-62.205 66.72,-68.301 67.66,-69.24 77.439,-69.24 77.439,-73.177 69.844,-73.177 68.93,-72.263 63.342,-72.263 62.885,-72.72 62.885,-78.232
  region net +48V: 88.429,-88.062 88.437,-83.922 88.437,-75.87 86.684,-75.87 86.684,-73.762 83.205,-73.762 83.205,-81.89 82.544,-82.55 82.544,-88.062
  region net NetC38_2: 45.994,-62.281 45.994,-67.462 46.883,-68.351 46.883,-71.069 43.479,-71.069 43.479,-67.412 43.073,-67.005 23.362,-67.005 22.651,-66.294 22.651,-62.281
Bottom Layer:
  rectangle net GND: 79.649,-87.681 80.969,-81.28
  rectangle net GND: 77.591,-84.963 82.163,-83.337
  rectangle net GND: 91.358,-87.579 92.374,-81.991
  rectangle net GND: 89.758,-85.014 92.069,-83.845
  rectangle net VIN: 87.573,-74.549 92.247,-59.131
  rectangle net VCC_12_24: 93.39,-90.602 99.638,-57.277
  rectangle net VCC_12_24: 86.938,-58.318 99.664,-42.545
  pour cut-out: 12.598,-61.824 10.871,-61.824 10.541,-62.154 10.541,-63.729 10.998,-64.186 12.598,-64.186 12.852,-63.932 12.852,-62.001 12.776,-62.001
  pour cut-out: -0.102,-34.849 4.115,-34.849 4.115,-41.326 4.623,-41.834 10.897,-41.834 13.166,-44.103 13.166,-73.981 8.458,-78.689 8.458,-90.881 8.331,-91.008 8.179,-90.856 -0.432,-90.856 -0.432,-35.179
  pour cut-out: 11.627,-50.597 11.932,-50.902 11.932,-52.984 11.348,-53.569 9.392,-53.569 9.062,-53.238 9.062,-50.597
  region net +48V: 88.429,-88.062 88.437,-83.922 88.437,-75.87 86.684,-75.87 86.684,-75.844 83.205,-75.844 83.205,-81.89 82.544,-82.55 82.544,-88.062

## Silkscreen, mask and mechanical layers (free items; w line width, h text height)
Top Overlay:
  lines w0.127: 13.05,-42.872 13.05,-75.181 13.076,-75.207 ; 93.099,-42.85 93.15,-42.901
  text "串口" at 86.202,3.2 h1.27
  text "目标温度、环境温度、压缩机排气温度、目标送风温度、水温度" at 35.935,2.261 h1.27
  text "iic湿度" at 70.936,2.083 h1.27
  text "湿度" at 9.951,1.803 h1.27
  text "-  SW2" at 26.01,-1.676 h1.27
  text "5V" at 30.734,-1.676 h1.27
  text "-     A1     -      A2     -     A3     -      A4    -      A5" at 38.303,-1.727 h1.27
  text "-     SCL  SDA   3.3V" at 67.462,-1.829 h1.27
  text "-     RX    TX    5V" at 82.982,-1.854 h1.27
  text "A6     -     SW1    5V" at 7.442,-1.905 h1.27
  text "SWD" at 3.988,-12.725 h1.27
  text "GND" at 12.116,-14.3 h1.27
  text "GND" at 4.166,-15.367 h1.27
  text "RX3" at 12.395,-17.145 h1.27
  text "SWCLK" at 4.216,-17.755 h1.27
  text "TX3" at 12.421,-19.558 h1.27
  text "3.3V" at 4.343,-20.549 h1.27
  text "+ -" at 74.162,-88.621 h1.52 r180
  text "+ -" at 49.118,-89.004 h1.52 r180
  text "+ -" at 62.046,-89.256 h1.52 r180
  text "+ -" at 36.418,-89.332 h1.52 r180
  text "SW1 SW2" at 1.569,-90.246 h1.02
  text "- 48V" at 79.217,-90.653 h1.27
  text "- 12V" at 91.079,-90.678 h1.27
  text "水泵" at 33.725,-92.583 h1.27
  text "冷风" at 46.781,-92.634 h1.27
  text "电磁阀" at 70.733,-92.634 h1.27
  text "水位开关2" at 2.356,-92.659 h1.27
  text "热风" at 59.278,-92.812 h1.27
Bottom Overlay:
  text "OUT" at 38.932,-26.289 h1.27
  text "GND" at 38.907,-29.108 h1.27
  text "3.3V" at 39.11,-32.055 h1.27
Top Solder:
  rectangle: 93.517,-73.203 99.588,-42.53
  rectangle: 88.849,-81.636 92.634,-76.2
Bottom Solder:
  rectangle: 88.996,-82.372 92.38,-75.946
  rectangle: 93.441,-75.057 99.689,-42.647
Mechanical 1:
  the board outline again, w0.254

## Text inside footprints (layer, text, board x,y; h text height)
Q1: Top Overlay "1" at 57.13,-76.041 h1.1 r90; Top Overlay "3" at 57.13,-72.591 h1.1 r90
Q2: Top Overlay "1" at 43.972,-76.27 h1.1 r90; Top Overlay "3" at 43.972,-72.82 h1.1 r90
Q3: Top Overlay "1" at 30.587,-76.219 h1.1 r90; Top Overlay "3" at 30.587,-72.769 h1.1 r90
Q16: Bottom Overlay "1" at 38.642,-81.985 h1.1 r270; Bottom Overlay "3" at 38.642,-78.535 h1.1 r270